# Altium PCB PCB_V2_Controla.PcbDoc
Units mm, origin at the board's own origin, x right, y up, seen from the top; angles counter-clockwise.
Board outline 95 x 129 mm, 2 copper layers (Top Layer, Bottom Layer); 22 components, 28 nets, 115 pads, 0 vias.
Unrouted connection lines stored in the file: 5.
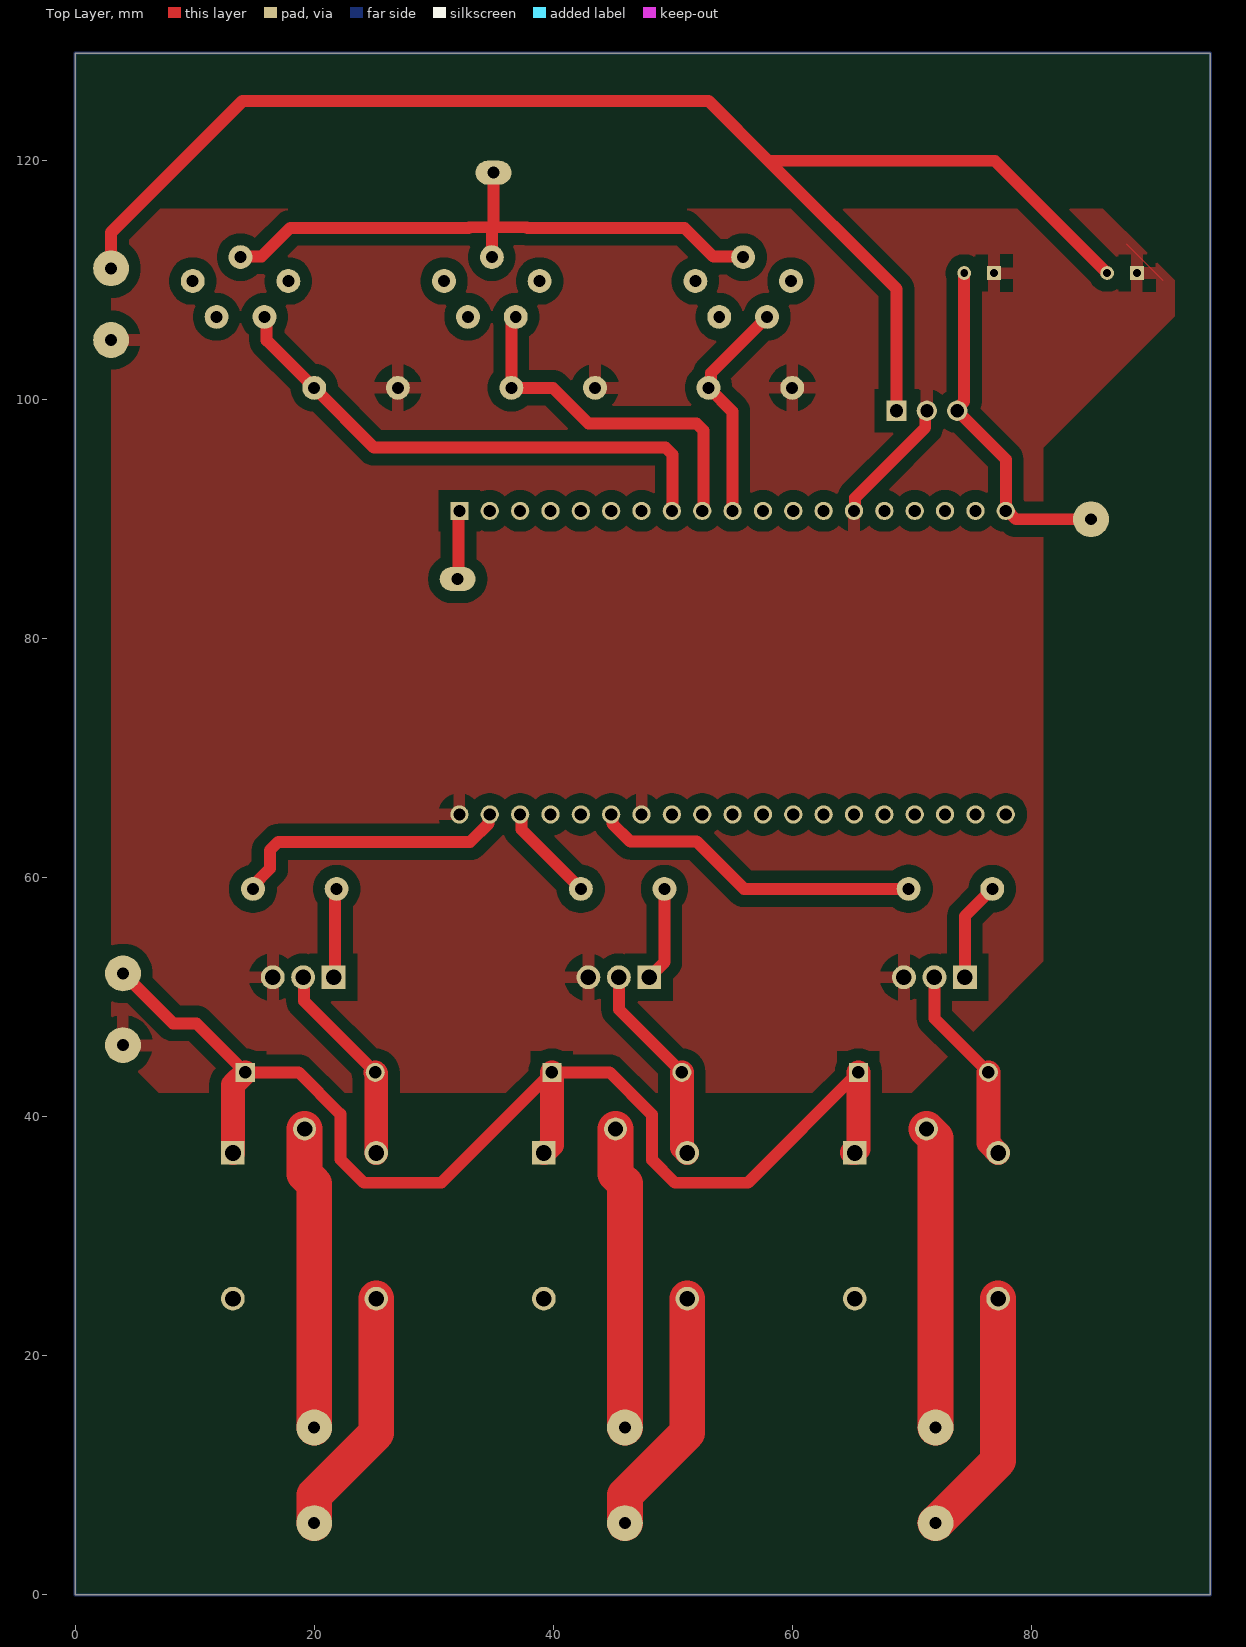
[diagram p0: Top Layer view]
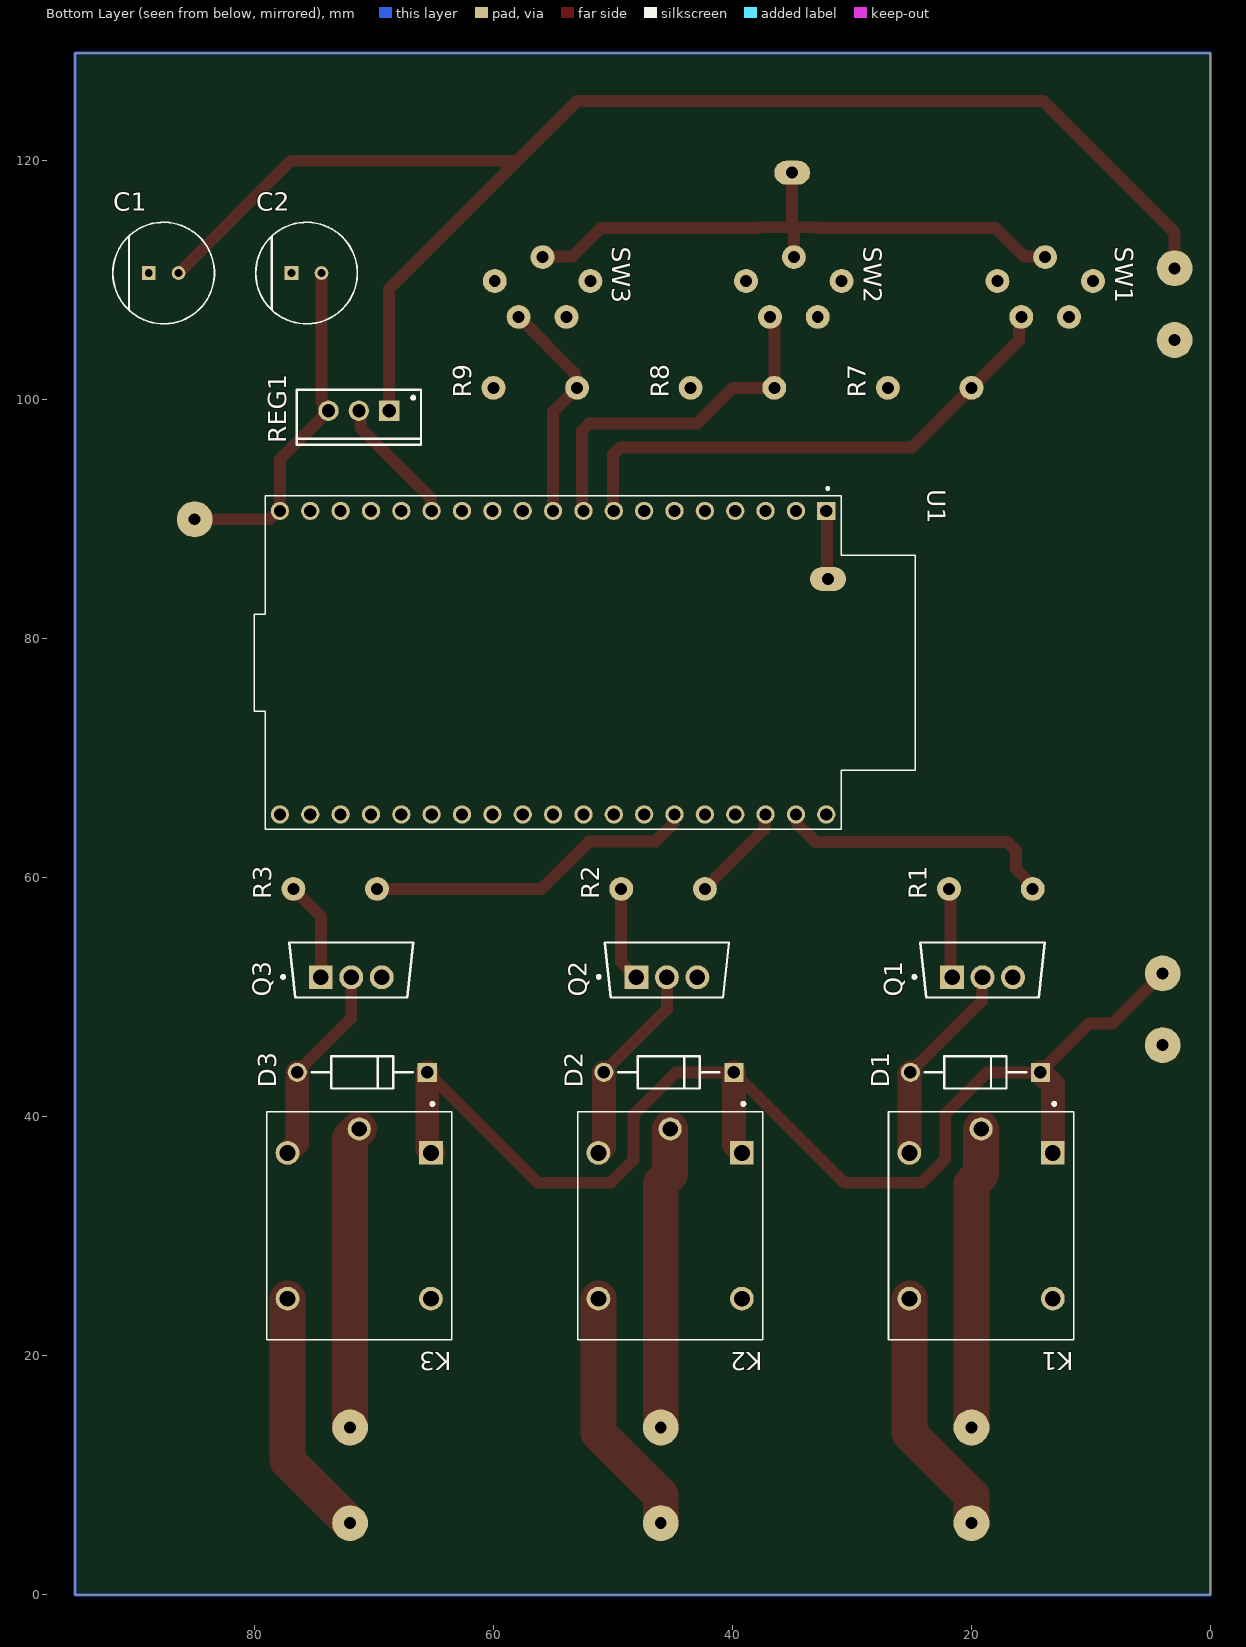
[diagram p1: Bottom Layer view, seen from below]
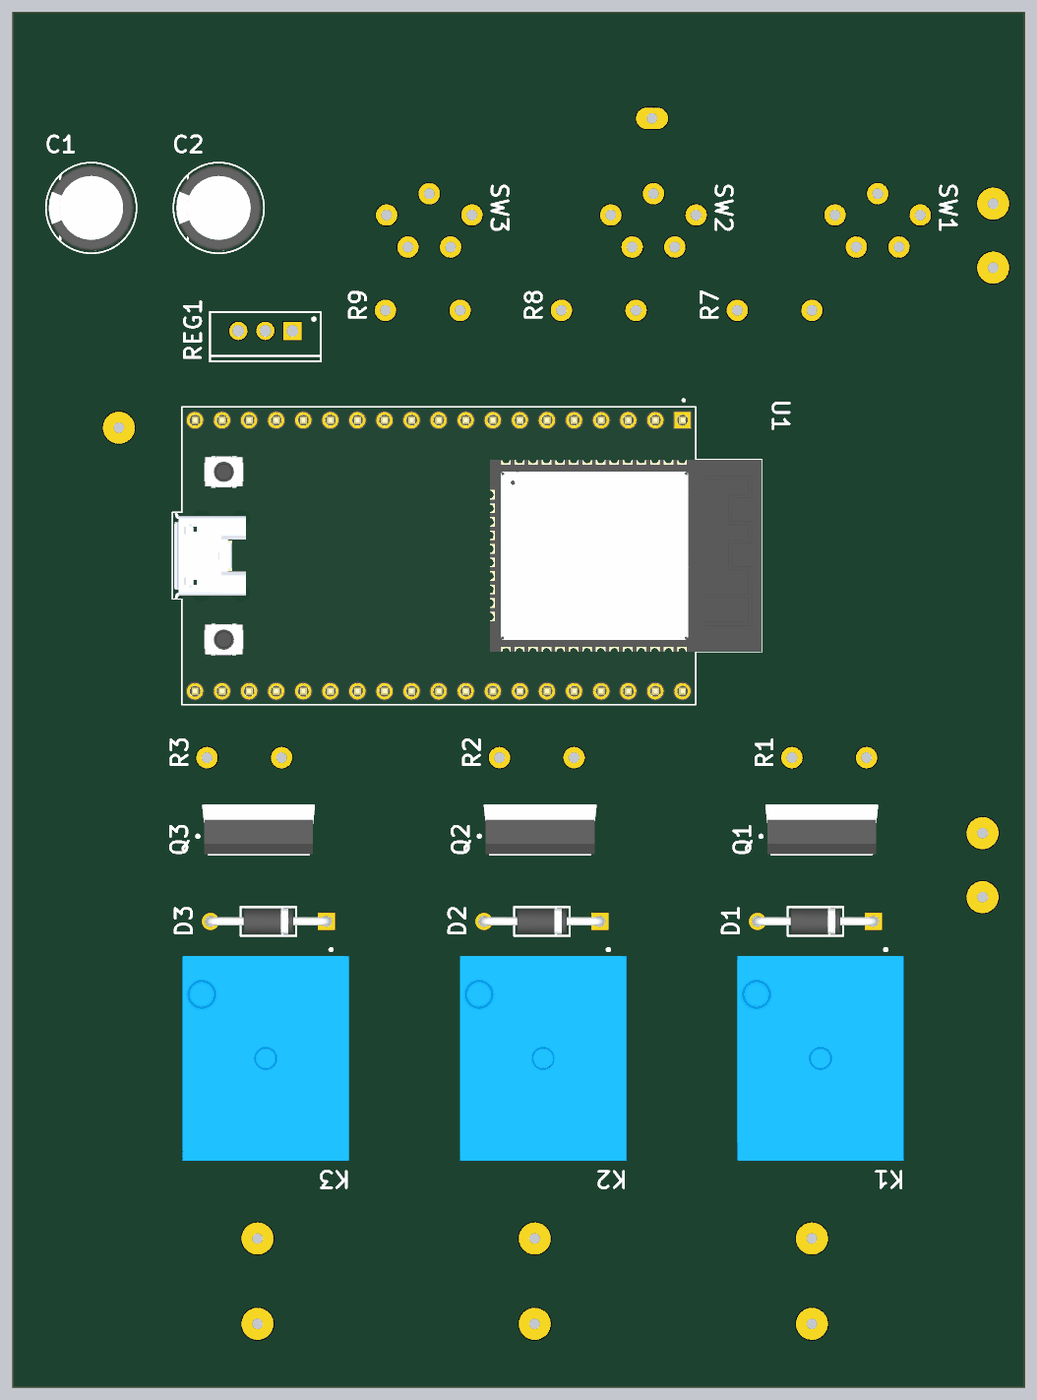
[diagram p2: 3D render of the assembled board from below, using the file's embedded part models]

## Layer stack, top to bottom
Top Solder: solder mask 0.0102, Solder Resist, Dk 3.5
Top Layer: signal copper 0.0356
Dielectric 1: dielectric 0.32, FR-4, Dk 4.8
Bottom Layer: signal copper 0.0356
Bottom Solder: solder mask 0.0102, Solder Resist, Dk 3.5

## Board outline
0,0 0,129 95,129 95,0

## Design rules (kind name [scope] priority, off if disabled: settings)
Clearance [All] p1: gap=1 ignorepadtopadclearanceinfootprint=TRUE
PolygonConnect [All] p1: connectstyle=Relief reliefconductorwidth=1 reliefentries=4 polygonreliefangle="90 Angle" airgapwidth=1
RoutingVias [All] p1: holewidth=0.711 width=1.27 viastyle="Through Hole" minholewidth=0.711 minwidth=1.27 maxholewidth=0.711 maxwidth=1.27
SolderMaskExpansion [All] p1: expansion=0.102 istentingtop=FALSE
SupplyNets "Schematic Supply Nets_2" [InNet('+12')] p1: voltage=0.000
SupplyNets "Schematic Supply Nets_1" [InNet('GND')] p2: voltage=0.000
Width [All] p1: maxlimit=3 minlimit=1 preferedwidth=2
30 further rules are at their usual default settings.

## Components (designator, comment, footprint, x,y, rotation, side; value= is the part's Value field where it differs from the comment)
C1 "EEAGA1V470" FP-RAD-TH-D_8_0_5-L_7_1-F-MFG 87.599,110.602 r180 bottom
C2 "EEAGA1V470" FP-RAD-TH-D_8_0_5-L_7_1-F-MFG 75.641,110.602 r180 bottom
D1 "1N4001-E3/54" FP-1N4001-E3-54-MFG 19.671,43.721 r0 bottom
D2 "1N4001-E3/54" FP-1N4001-E3-54-MFG 45.325,43.721 r0 bottom
D3 "1N4001-E3/54" FP-1N4001-E3-54-MFG 70.979,43.721 r0 bottom
K1 "SRD-05VDC-SL-C" RELAY_SRD-05VDC-SL-C 19.194,30.88 r270 bottom
K2 "SRD-05VDC-SL-C" RELAY_SRD-05VDC-SL-C 45.214,30.88 r270 bottom
K3 "SRD-05VDC-SL-C" RELAY_SRD-05VDC-SL-C 71.233,30.88 r270 bottom
Q1 "TIP31C" FP-TO-220-P0A0015988-MFG 19.078,52.282 r90 bottom
Q2 "TIP31C" FP-TO-220-P0A0015988-MFG 45.489,52.282 r90 bottom
Q3 "TIP31C" FP-TO-220-P0A0015988-MFG 71.9,52.282 r90 bottom
R1 "General 1/4 W Resistor" "Generic 1/4W Metallic Resistor Axial" 14.877,59.072 r0 bottom
R2 "General 1/4 W Resistor" "Generic 1/4W Metallic Resistor Axial" 42.309,59.072 r0 bottom
R3 "General 1/4 W Resistor" "Generic 1/4W Metallic Resistor Axial" 69.741,59.072 r0 bottom
R7 "General 1/4 W Resistor" "Generic 1/4W Metallic Resistor Axial" 20,101 r0 bottom
R8 "General 1/4 W Resistor" "Generic 1/4W Metallic Resistor Axial" 36.5,101 r0 bottom
R9 "General 1/4 W Resistor" "Generic 1/4W Metallic Resistor Axial" 53,101 r0 bottom
REG1 "L7805CV" TO220 71.265,99.077 r0 bottom
SW1 "16mm 5 Pin Momentary Button" "16mm Pushbutton 5 Pins" 13.833,111.935 r270 bottom
SW2 "16mm 5 Pin Momentary Button" "16mm Pushbutton 5 Pins" 34.864,111.935 r270 bottom
SW3 "16mm 5 Pin Momentary Button" "16mm Pushbutton 5 Pins" 55.894,111.935 r270 bottom
U1 "ESP32-DEVKITC" MODULE_ESP32-DEVKITC 55,78 r270 bottom

## Footprints (in the part's own frame and the unit in brackets; to place one, negate y for a bottom-side part, rotate by r counter-clockwise, add the part's x,y. Pads: shape width x height; smd on the part's side, far side on the other; paste and mask are expansions set on the pad)
"16mm Pushbutton 5 Pins" [mm] "Momentary Button 16mm with indicator LED."
  round 2 hole 1: COM(0,0) LED(2,-4) LED(2,4) NC(5,2) NO(5,-2)
FP-1N4001-E3-54-MFG [mm]
  rect 1.6x1.6 hole 1.05 paste-2539.97 mask+0: 1(-5.438,0)
  round 1.6 hole 1.05 paste-2539.97 mask+0: 2(5.438,0)
  silkscreen extent -4.24,-1.35 4.24,1.35, body extent -5.83,-1.17 5.83,1.17, height 2.35
FP-RAD-TH-D_8_0_5-L_7_1-F-MFG [mm]
  rect 1.15x1.15 hole 0.65 paste-2539.97 mask+0: 1(-1.25,0)
  round 1.15 hole 0.65 paste-2539.97 mask+0: 2(1.25,0)
  silkscreen extent -4.25,-4.25 4.25,4.25, body extent -4,-4.01 4,4, height 8
FP-TO-220-P0A0015988-MFG [mm]
  rect 2x2 hole 1.3 paste-2539.97 mask+0: 1(-0.607,2.55)
  round 2 hole 1.3 paste-2539.97 mask+0: 2(-0.607,0) 3(-0.607,-2.55)
  silkscreen extent -2.3,-5.2 2.3,5.82, body extent -2.26,-5.1 2.24,5.1, height 19.68
"Generic 1/4W Metallic Resistor Axial" [mm]
  round 2 hole 1: 1(0,0) 2(7,0)
MODULE_ESP32-DEVKITC [mm]
  rect 1.53x1.53 / inner round 1.53 / far side rect 1.53x1.53 hole 1.02: 1(-12.7,22.85)
  round 1.53 hole 1.02: 2(-12.7,20.31) 3(-12.7,17.77) 4(-12.7,15.23) 5(-12.7,12.69) 6(-12.7,10.15) 7(-12.7,7.61) 8(-12.7,5.07) 9(-12.7,2.53) 10(-12.7,-0.01) 11(-12.7,-2.55) 12(-12.7,-5.09) 13(-12.7,-7.63) 14(-12.7,-10.17) 15(-12.7,-12.71) 16(-12.7,-15.25) 17(-12.7,-17.79) 18(-12.7,-20.33) 19(-12.7,-22.87) 20(12.7,-22.87) 21(12.7,-20.33) 22(12.7,-17.79) 23(12.7,-15.25) 24(12.7,-12.71) 25(12.7,-10.17) 26(12.7,-7.63) 27(12.7,-5.09) 28(12.7,-2.55) 29(12.7,-0.01) 30(12.7,2.53) 31(12.7,5.07) 32(12.7,7.61) 33(12.7,10.15) 34(12.7,12.69) 35(12.7,15.23) 36(12.7,17.77) 37(12.7,20.31) 38(12.7,22.85)
  silkscreen extent -14.67,-25 13.95,30.3, body extent -13.97,-24.8 13.97,30.3, height 3.25
RELAY_SRD-05VDC-SL-C [mm]
  rect 1.98x1.98 / inner round 1.98 / far side rect 1.98x1.98 hole 1.32: A1(-6.1,6)
  round 1.98 hole 1.32: A2(-6.1,-6) NC(6.1,6) NO(6.1,-6)
  round 1.935 hole 1.29: COM(-8.1,0)
  silkscreen extent -10.3,-7.75 9.55,7.75, body extent -9.6,-7.8 9.6,7.8, height 15.8
TO220 [mm] "TO, Thru-Hole, Vertical, Heatsink Mounted; 3 In-Line Leads; Pitch 2.54 mm"
  rect 1.7x1.7 hole 1.1: 1(-2.54,0)
  round 1.7 hole 1.1: 2(0,0) 3(2.54,0)
  silkscreen extent -5.2,-1.75 5.2,2.85, body extent -5.25,-1.8 5.25,2.9, height 19.7

## Part data
C1 C2: library part CMP-05427-002179-1, "Aluminum Electrolytic Capacitors (Radial Lead Type) 47uF ±20% 35V", Capacitance=47uF, Case/Package=Radial, Leakage Current=16.5uA, Max Operating Temperature=105°C, Min Operating Temperature=-55°C, Package Quantity=200, Ripple Current=96mA, Tolerance=20%, Voltage=35V, Construction=RADIAL, Contact Plating=Tin, Diameter=8mm, Height=7mm, Height - Seated (Max)=0.276inch, Lead Diameter=0.45mm, Lead Free="Lead Free", Lead Pitch=2.5mm, Lead/Base Style=Straight, Length=7mm, Life (Hours)=1000Hour, Mount="Through Hole", Number of Pins=2, Packaging=Bulk, Radiation Hardening=No, Reach SVHC Compliant=Yes, Ripple Current (AC)=96mA, RoHS Compliant=Yes, Series=GA, Termination=Radial, Voltage Rating=35V, Voltage Rating (DC)=35V
D1 D2 D3: library part CMP-02540-000077-1, "DIODE GEN PURP 50V 1A DO204AL", Average Rectified Current=1A, Capacitance=15pF, Case/Package=DO-204AL, Forward Voltage=1.1V, Max Forward Surge Current (Ifsm)=30A, Max Operating Temperature=150°C, Max Repetitive Reverse Voltage (Vrrm)=50V, Max Reverse Current=5uA, Min Operating Temperature=-50°C, Package Quantity=5500, Peak Non-Repetitive Surge Current=45A, Current=1A, Current Rating=1A, Diameter=2.7mm, Element Configuration=Single, Forward Current=1A, Height=2.7mm, Lead Free="Lead Free", Length=0.204inch, Max Reverse Voltage (DC)=50V, Max Surge Current=30A, Mount="Through Hole", Number of Pins=2, Output Current=1A, Packaging="Tape and Reel", Polarity=Standard, Radiation Hardening=No, Reverse Voltage=50V, RoHS Compliant=Yes, Series=-, Voltage=50V, Voltage Rating (DC)=50V, Width=2.7mm
K1 K2 K3: "5V Trigger Relay Module For Arduino And Raspberry Pi 5V Trigger Relay Module For Arduino And Raspberry Pi", Package="NON STANDARD-5 Songle Relay", Availability="Not in stock", Check_prices=https://www.snapeda.com/parts/SRD-05VDC-SL-C/Songle+Relay/view-part/?ref=eda, MF="Songle Relay", MP=SRD-05VDC-SL-C, Price=None, SnapEDA_Link=https://www.snapeda.com/parts/SRD-05VDC-SL-C/Songle+Relay/view-part/?ref=snap
Q1 Q2 Q3: library part CMP-12195-000001-1, "TRANS NPN 100V 3A TO-220", Collector Base Voltage=100V, Collector Emitter Saturation Voltage=1.2V, Emitter Base Voltage=5V, Manufacturer=STMicroelectronics, Max Collector Current=3A, Max Junction Temp=+150°C, Package=TO-220-P0A0015988, Power Dissipation=2W, Temperature="to +150°C", Automotive=No, Category=Trans, Collector Emitter Voltage=100V, ComponentLink2Description=Datasheet, ComponentLink2URL=https://www.st.com/resource/en/datasheet/tip31c.pdf, Device Class L1="Discrete Semiconductors", Device Class L2=Transistors, Device Class L3=BJTs, Digikey Description="TRANS NPN 100V 3A TO-220", Height=19.68mm, Hfe Max=50, Hfe Min=10, Hfe Testic=3A, Hfe Testvce=4V, Lead Free=Yes, Manufacturer Part Number=TIP31C, Mouser Description="Bipolar Transistors - BJT NPN Gen Pur Power", Number Of Elements=1, Number Of Npn=1, Octopart=https://octopart.com/tip31c-stmicroelectronics-15555, RoHS=TRUE, Standoff Height=3.5mm, Temperature Range High=+150°C
R1 R2 R3 R7 R8 R9: library part CMP-009-00323-1, "1% Tolerance, 0.25W", Design Item ID="General 1/4 W Resistor", Source=Santiagos_Library.SchLib
REG1: library part CMP-0244-00483-1, "Positive Voltage Regulator, 5V, 3-Pin TO-220", ComponentLink1Description="Manufacturer URL", ComponentLink1URL=http://www.st.com, ComponentLink2Description=Datasheet, ComponentLink2URL=http://www.st.com/internet/com/TECHNICAL_RESOURCES/TECHNICAL_LITERATURE/DATASHEET/CD00000444.pdf, ComponentLink3Description="Package Specification", ComponentLink3URL=http://www.st.com/internet/com/TECHNICAL_RESOURCES/TECHNICAL_LITERATURE/PACKAGE_INFORMATION/CD00004649.pdf, DatasheetVersion=16/11/2011, PackageDescription="TO, Thru-Hole, Vertical, Heatsink Mounted; 3 In-Line Leads; Pitch 2.54 mm", PackageReference=TO220, PackageVersion=ver3.0
SW1 SW2 SW3: library part CMP-011-00013-1, "16mm Button with LED indicator.", Design Item ID="16mm 5 Pin Momentary Button", Source=Santiagos_Library.SchLib
U1: "ESP32-WROOM-32UE series Transceiver; 802.11 b/g/n (Wi-Fi, WiFi, WLAN), Bluetooth Â® Smart Ready 4.x Dual Mode Evaluation Board", Package=None, Availability="In Stock", Check_prices=https://www.snapeda.com/parts/ESP32-DEVKITC/Espressif+Systems/view-part/?ref=eda, MF="Espressif Systems", MP=ESP32-DEVKITC, Price=None, Purchase-URL=https://pricing.snapeda.com/search/part/ESP32-DEVKITC/?ref=eda, SnapEDA_Link=https://www.snapeda.com/parts/ESP32-DEVKITC/Espressif+Systems/view-part/?ref=snap

## Free pads (board coordinates)
  oval 3x2 hole 1: 3V3(32,85) 3V3(35,119)
  round 3 hole 1: 5V(4,52) 5V(85,90) COM1(20,14) COM2(46,14) COM3(72,14) GND(3,105) GND(4,46) NO1(20,6) NO2(46,6) NO3(72,6) VCC(3,111)

## Nets (pads, with @x,y where several pads share a name; then routed paths per layer and width w, separated by ;. In a path a pad name is that pad's centre, name@x,y a point inside that pad or via, vN(x,y) a via of type N, cw(c..) or ccw(c..) an arc to the next point about the centre after c; other vN are vias at no path point)
3.3V: pad.3V3 SW1.COM SW2.COM SW3.COM U1.1 | length 57.2
  Top Layer w1: SW1.COM 13.898,112 15.612,112 18,114.388 32.927,114.388 32.974,114.435 35,114.435 ; pad.3V3@32,85 32.075,85.075 32.075,90.625 U1.1 ; SW2.COM 34.864,114.298 35,114.435 ; pad.3V3@35,119 35,114.435 ; SW3.COM 55.935,111.935 SW3.COM@55.971,111.971 ; SW3.COM@56,112 SW3.COM@55.971,111.971 ; 35,114.435 37.809,114.435 37.856,114.388 50.977,114.388 53.394,111.971 SW3.COM@55.971,111.971
5V: C2.2 D1.1 D2.1 D3.1 K1.A1 K2.A1 K3.A1 pad.5V REG1.3 U1.19 | length 135.3
  Top Layer w1: pad.5V@4,52 8.181,47.819 10.135,47.819 D1.1 18.696,43.721 22.194,40.223 22.194,36.445 24.158,34.48 30.646,34.48 D2.1 44.715,43.721 48.263,40.173 48.263,36.395 50.178,34.48 56.3,34.48 D3.1 ; C2.2 74.391,99.852 73.805,99.266 REG1.3 77.87,95.012 U1.19 78.013,90.7 78.713,90 pad.5V@85,90
  Top Layer w2: K1.A1 13.194,42.682 D1.1 ; K2.A1 39.887,37.654 D2.1 ; K3.A1@65,37 65.02,36.98 K3.A1 65.541,37.288 D3.1
+12: C1.2 pad.VCC REG1.1 | length 122.2
  Top Layer w1: pad.VCC 3,114 14,125 53,125 58,120 ; REG1.1 68.725,109.275 58,120 ; C1.2 76.951,120 58,120
BOT1: R7.1 SW1.NO U1.8 | length 44.7
  Top Layer w1: SW1.NO 16.024,106.744 16.024,104.976 R7.1 25,96 49.414,96 50,95.414 50,90.77 U1.8
BOT2: R8.1 SW2.NO U1.9 | length 30.4
  Top Layer w1: SW2.NO 36.864,106.664 36.5,106.301 R8.1 39.964,101 42.964,98 52,98 52.586,97.414 52.586,92 52.571,91.986 52.571,90.801 U1.9
BOT3: R9.1 SW3.NO U1.10 | length 19.1
  Top Layer w1: U1.10 55,90.71 55,99 R9.1 53.191,101.191 53.191,102.232 SW3.NO
BOT4: U1.11
BOT5: U1.12
BOT6: U1.13
COM1: K1.COM pad.COM1 | length 25.3
  Top Layer w3: K1.COM 19.194,35.202 20,34.396 pad.COM1
COM2: K2.COM pad.COM2 | length 25.3
  Top Layer w3: K2.COM 45.214,35.202 46,34.415 pad.COM2
COM3: K3.COM pad.COM3 | length 25.3
  Top Layer w3: K3.COM 72,38.213 pad.COM3
GND: C1.1 C2.1 pad.GND Q1.3 Q2.3 Q3.3 R7.2 R8.2 R9.2 REG1.2 U1.14 U1.32 U1.38 | length 10.9
  Top Layer w1: U1.14 65.271,90.801 65.271,91.802 71.131,97.662 71.131,98.943 REG1.2
NetQ1_1: Q1.1 R1.2 | length 7.5
  Top Layer w1: Q1.1 21.753,51.799 21.753,58.947 R1.2
NetQ2_1: Q2.1 R2.2 | length 7.9
  Top Layer w1: Q2.1 49.309,52.944 R2.2
NetQ3_1: Q3.1 R3.2 | length 8.3
  Top Layer w1: Q3.1 74.45,56.781 R3.2
NetR1_1: R1.1 U1.37 | length 23.8
  Top Layer w1: R1.1 14.877,59.343 16.293,60.758 16.293,62.293 17,63 33.053,63 34.589,64.535 34.589,65.199 U1.37
NetR2_1: R2.1 U1.36 | length 8.3
  Top Layer w1: U1.36 37.331,65.199 37.331,64.05 R2.1
NetR3_1: R3.1 U1.33 | length 27.9
  Top Layer w1: U1.33 44.951,65.199 44.951,64.535 46.452,63.035 52,63.035 55.963,59.072 R3.1
NO1: K1.NO pad.NO1 | length 20.9
  Top Layer w3: pad.NO1 20,8.343 25.194,13.537 K1.NO
NO2: K2.NO pad.NO2 | length 20.9
  Top Layer w3: pad.NO2 46,8.343 51.214,13.557 K2.NO
NO3: K3.NO pad.NO3 | length 20.9
  Top Layer w3: pad.NO3 77.233,11.233 K3.NO
SW1: 
SW1_GND: D1.2 K1.A2 Q1.2 | length 17.2
  Top Layer w1: Q1.2 19.128,51.624 19.128,49.702 D1.2
  Top Layer w2: D1.2 25.194,43.636 K1.A2
SW2: 
SW2_GND: D2.2 K2.A2 Q2.2 | length 17.1
  Top Layer w1: Q2.2 45.489,48.995 D2.2
  Top Layer w2: D2.2 50.763,37.431 K2.A2
SW3: 
SW3_GND: D3.2 K3.A2 Q3.2 | length 16.9
  Top Layer w1: Q3.2 71.9,48.238 D3.2
  Top Layer w2: D3.2 76.417,37.796 K3.A2
pads on no net: K1.NC K2.NC K3.NC SW1.LED SW1.NC SW2.LED SW2.NC SW3.LED SW3.NC U1.2 U1.3 U1.4 U1.5 U1.6 U1.7 U1.15 U1.16 U1.17 U1.18 U1.20 U1.21 U1.22 U1.23 U1.24 U1.25 U1.26 U1.27 U1.28 U1.29 U1.30 U1.31 U1.34 U1.35
copper on no net: | length 448
  Bottom Layer w0.254: 0,0 95,0 95,129 0,129 0,0

## Polygon pours and split planes (outlines as drawn)
GND on Top Layer "NONET_L01_P-001" (solid, pour order 3): 6,116 86,116 92,110 92,107 81,96 81,53 70,42 7,42 3,46 3,113
no net on Top Layer "NONET_L01_P-001" (solid, pour order 2): 88,113 91,110